# Altium PCB PCB.PcbDoc (part 2 of 2)
Units mm, origin at the board's own origin, x right, y up, seen from the top; angles counter-clockwise.
Board outline 100 x 110 mm, 6 copper layers (Top Layer, Inner Layer 2 (GND), Layer 3, Layer 4, Inner Layer 5 (GND), Bottom Layer 6), stack 1.597 mm thick; 88 components, 67 nets, 500 pads, 417 vias.
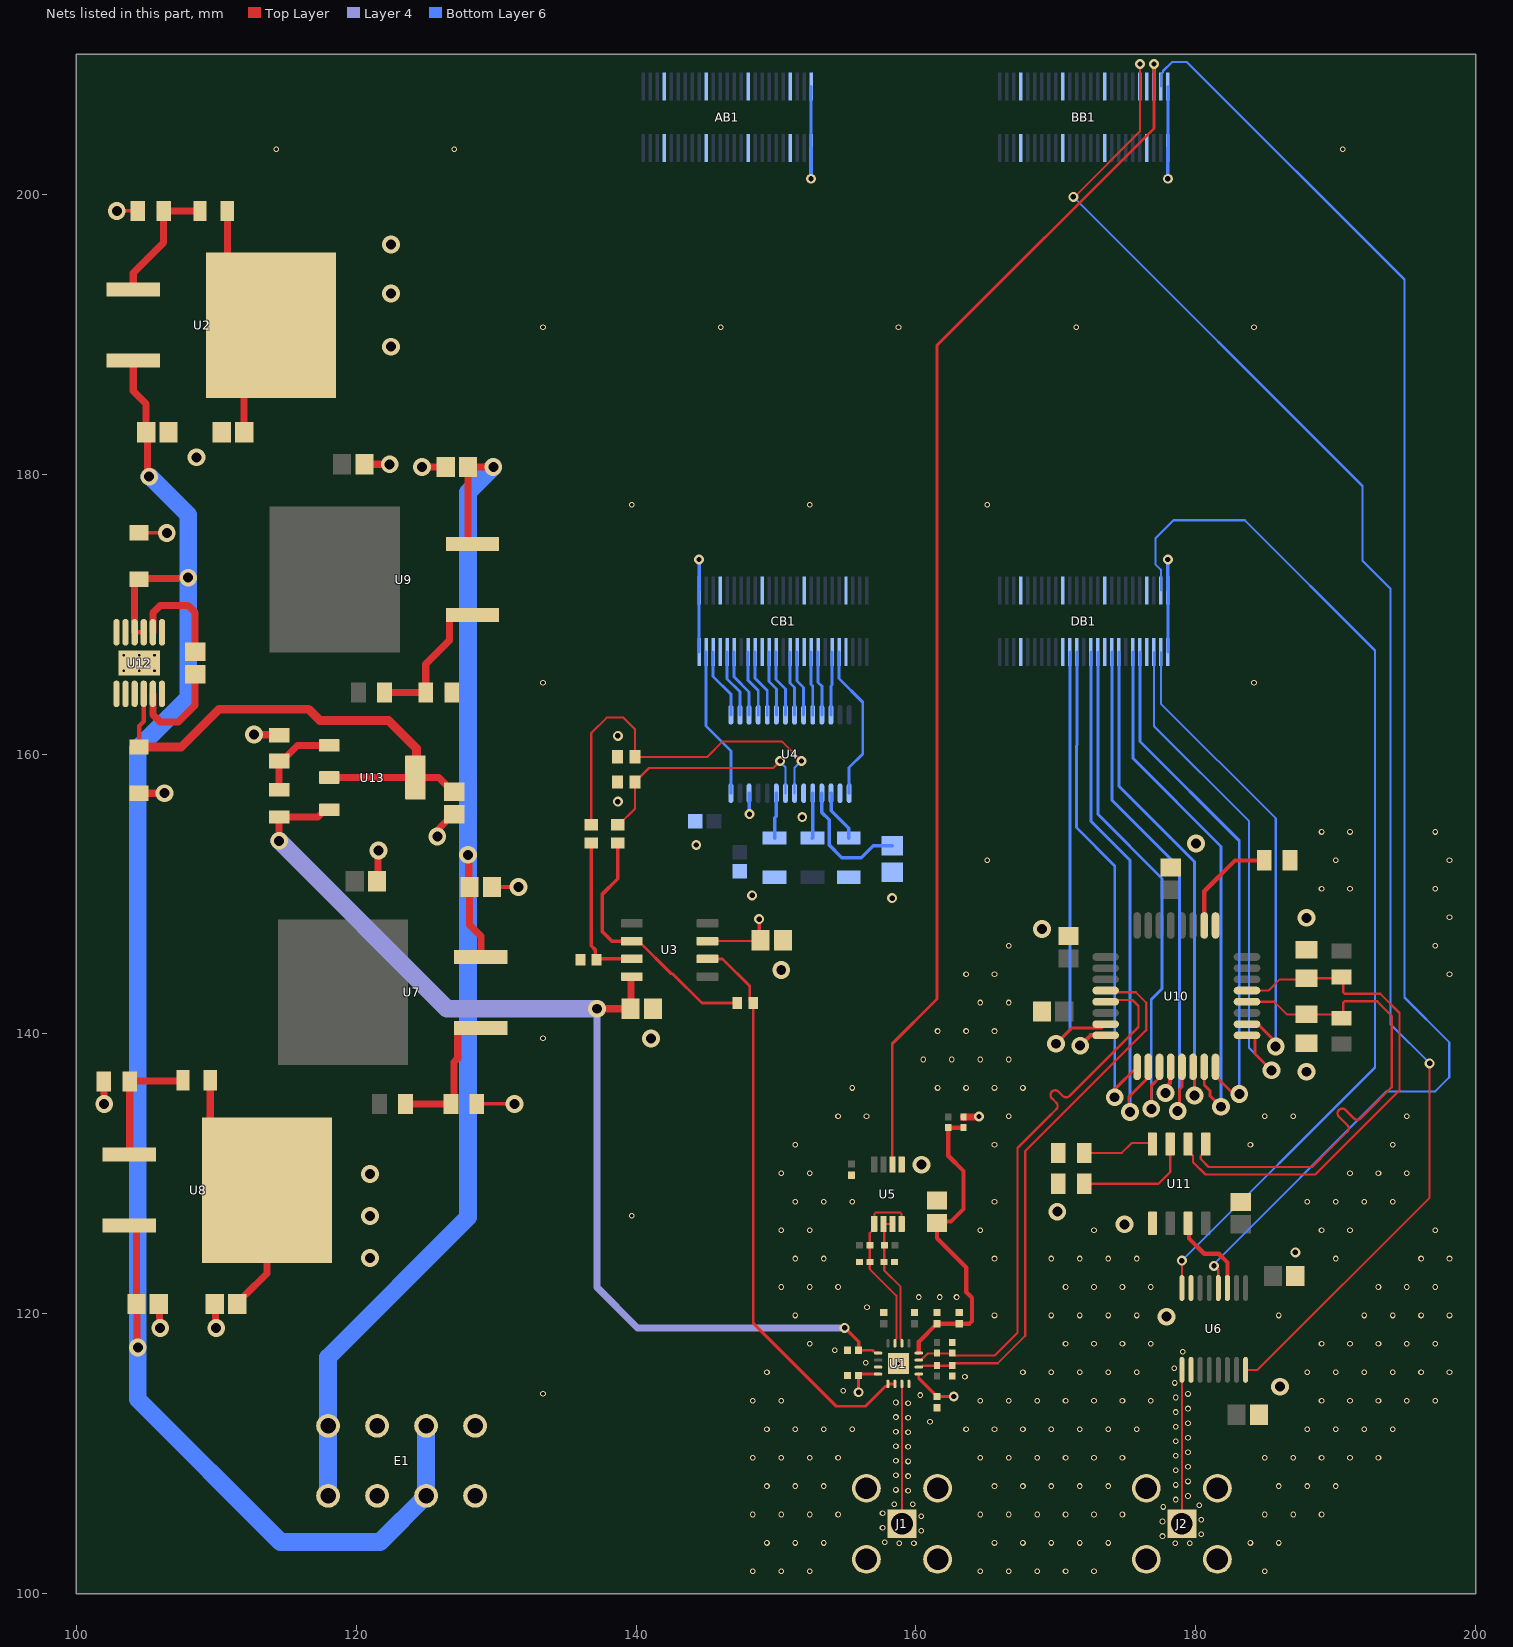
[diagram p6: the nets of this part, all layers, seen from the top]

## Via types
v1: diameter 0.406, hole 0.254, Top Layer to Bottom Layer 6, 278 vias
v2: diameter 1.27, hole 0.711, Top Layer to Bottom Layer 6, 62 vias
v3: diameter 0.711, hole 0.381, Top Layer to Bottom Layer 6, 50 vias
v4: diameter 0.6, hole 0.6, Top Layer to Bottom Layer 6, 16 vias
v5: diameter 0.5, hole 0.2, Top Layer to Bottom Layer 6, 7 vias
v6: diameter 3.4, hole 3.4, Top Layer to Bottom Layer 6, 4 vias

## Nets (pads, with @x,y where several pads share a name; then routed paths per layer and width w, separated by ;. In a path a pad name is that pad's centre, name@x,y a point inside that pad or via, vN(x,y) a via of type N, cw(c..) or ccw(c..) an arc to the next point about the centre after c; other vN are vias at no path point) (continued)
+5V_AN: C11.2 C21.1 C33.1 C35.2 R12.1 U1.5 U1.16 U3.7 U8.4 | length 29.9
  Top Layer w0.152: U3.7@145.1,146.635 148.835,146.635 C35.2@148.9,146.7
  Top Layer w0.203: v3(155.9,114.4) C21.1@155.9,115.6 156,115.7 157.102,115.7 U1.16@157.3,115.7 ; U1.5@160.2,115.7 160.2,115.4 161.342,114.258 C33.1@161.5,114.1 v3(162.7,114.1)
  Top Layer w0.254: v3(148.8,148.2) 148.8,146.8 C35.2@148.9,146.7
  Top Layer w0.508: R12.1@109.575,136.7 109.575,132.91 U8.4@113.64,128.844 113.64,122.882 112.785,122.027 112.752,122.027 111.5,120.775 C11.2@111.5,120.7
  other v2: 121,124 121,127 121,130
+5V_FPGA: AB1.1 AB1.50 BB1.1 BB1.50 C2.2 CB1.1 CB1.50 DB1.1 DB1.50 R1.1 U2.4 | length 44.3
  Top Layer w0.508: R1.1@110.8,198.8 110.8,193.774 U2.4@113.929,190.644 112,188.715 C2.2@112,183
  Bottom Layer 6 w0.203: CB1.1@144.5,167.3 CB1.50@144.5,171.7 ; AB1.50@152.5,203.3 AB1.1@152.5,207.7 ; DB1.50@178,167.3 DB1.1@178,171.7 ; BB1.50@178,203.3 BB1.1@178,207.7
  Bottom Layer 6 w0.254: CB1.50@144.5,171.7 v3(144.5,173.9) ; v3(152.5,201.1) AB1.50@152.5,203.3 ; DB1.1@178,171.7 v3(178,173.9) ; v3(178,201.1) BB1.50@178,203.3
  other v2: 122.5,189.1 122.5,192.9 122.5,196.4
+6V: C8.2 C12.2 E1.A4 U7.3 U9.3 | length 93.5
  Top Layer w0.508: v2(128,152.8) 128.05,152.75 128.05,150.55 C8.2@128.1,150.5 128.1,147.8 128.91,146.99 U7.3@128.91,145.507 ; U9.3@128.321,175.007 128.246,175.007 128,175.253 C12.2@128,180.5 v2(129.8,180.5)
  Bottom Layer 6 w1.27: E1.A4@118,107 E1.A4@118,112 118,116.9 128,126.9 v2(128,152.8) 128,178.7 v2(129.8,180.5)
+8V: C1.2 C10.2 C29.1 E1.A2 U2.3 U8.3 U12.9 U12.10 | length 125.8
  Top Layer w0.305: U12.10@104.175,168.7 U12.9@104.815,168.7
  Top Layer w0.508: U8.3@103.79,126.304 104.054,126.304 104.3,126.058 C10.2@104.3,120.7 104.35,120.65 104.35,117.65 v2(104.4,117.6) ; U2.3@104.079,188.104 104.079,185.927 105,185.006 C1.2@105,183 105.106,182.894 105.106,179.92 v2(105.211,179.814) ; U12.10@104.175,168.7 104.175,172.204 104.471,172.5 C29.1@104.5,172.5 104.55,172.55 107.95,172.55 v2(108,172.6)
  Bottom Layer 6 w1.27: v2(105.211,179.814) 105.286,179.814 108,177.1 v2(108,172.6) 108,164 104.4,160.4 v2(104.4,117.6) 104.4,113.9 114.6,103.7 121.7,103.7 E1.A2@125,107 E1.A2@125,112
-5V_AN: C22.2 C36.2 R33.1 U1.13 U3.4 U13.3 | length 80.2
  Top Layer w0.203: C22.2@155.9,117.4 156.903,117.4 157.103,117.2 U1.13@157.3,117.2
  Top Layer w0.254: v3(154.9,119) 155.9,118 C22.2@155.9,117.4
  Top Layer w0.508: v2(114.5,153.8) R33.1@114.5,155.5 117.286,155.5 117.806,156.02 U13.3@118.081,156.02 ; v2(137.2,141.8) C36.2@139.6,141.8 139.65,141.85 139.65,144.049 139.696,144.095 U3.4@139.7,144.095
  Layer 4 w0.508: v2(137.2,141.8) 137.2,121.9 140.1,119 v3(154.9,119)
  Layer 4 w1.27: v2(114.5,153.8) 126.5,141.8 v2(137.2,141.8)
-8V-Charge-Pump: C31.1 C32.2 U12.4 U13.2 U13.4 | length 37.5
  Top Layer w0.305: C31.1@104.5,160.5 104.5,162 104.825,162.325 U12.4@104.825,164.3
  Top Layer w0.508: U13.2@118.081,158.32 U13.4@124.231,158.32 125.905,158.32 126.925,157.3 C32.2@127,157.3
  Top Layer w0.635: C31.1@104.5,160.5 107.5,160.5 110.2,163.2 116.6,163.2 117.4,162.4 122.3,162.4 124.3,160.4 124.3,158.389 U13.4@124.231,158.32
COMPARE_OUT_N: R18.1 R22.2 U1.11 U5.1 U5.4 | length 12.9
  Top Layer w0.152: U1.11@158.5,117.9 158.5,118.113 158.598,118.21 158.598,121.302 156.7,123.2 R22.2@156.7,123.7 R18.1@156.7,124.9 156.7,125.757 157.025,126.081 157.025,127.146 157.114,127.235 158.885,127.235 158.975,127.146 U5.4@158.975,126.431
COMPARE_OUT_P: R19.1 R23.2 U1.10 U5.2 U5.3 | length 9.6
  Top Layer w0.152: U5.3@158.325,126.431 157.801,126.431 157.735,126.366 R19.1@157.735,124.9 157.735,123.7 157.735,123.096 158.902,121.929 158.902,118.21 159,118.113 U1.10@159,117.9
D0: DB1.49 U10.2 | length 34.5
  Top Layer w0.203: U10.2@183.65,140.7 184.417,140.7 185.496,139.621 185.496,139.304 v2(185.7,139.1)
  Bottom Layer 6 w0.152: DB1.49@177.5,167.3 177.5,163.6 185.7,155.4 v2(185.7,139.1)
D1: DB1.48 U10.1 | length 36.8
  Top Layer w0.203: U10.1@183.65,139.9 184.063,139.9 184.223,139.74 184.223,138.577 v2(185.4,137.4)
  Bottom Layer 6 w0.152: DB1.48@177,167.3 177,162 183.8,155.2 183.8,139 v2(185.4,137.4)
D2: DB1.46 U10.32 | length 37.4
  Top Layer w0.203: U10.32@181.4,137.65 181.4,136.987 182.687,135.7 v2(183.1,135.7)
  Bottom Layer 6 w0.203: DB1.46@176,167.3 176,160.9 183.1,153.8 v2(183.1,135.7)
D3: DB1.45 U10.31 | length 38.5
  Top Layer w0.203: U10.31@180.6,137.65 180.6,136.352 181.012,135.939 181.012,135.587 v2(181.8,134.8)
  Bottom Layer 6 w0.203: DB1.45@175.5,167.3 175.5,159.7 181.8,153.4 v2(181.8,134.8)
D4: DB1.43 U10.30 | length 36
  Top Layer w0.203: U10.30@179.8,137.65 179.9,137.55 v2(179.9,135.6)
  Bottom Layer 6 w0.203: DB1.43@174.5,167.3 174.5,157.7 179.9,152.3 v2(179.9,135.6)
D5: DB1.42 U10.29 | length 38.1
  Top Layer w0.203: v2(178.7,134.5) 178.823,134.623 178.823,136.024 179,136.201 U10.29@179,137.65
  Bottom Layer 6 w0.203: DB1.42@174,167.3 174,156.7 178.823,151.877 178.823,134.623 v2(178.7,134.5)
D6: DB1.40 U10.27 | length 38.1
  Top Layer w0.203: v2(176.813,134.652) 176.813,136.296 177.4,136.883 U10.27@177.4,137.65
  Bottom Layer 6 w0.203: DB1.40@173,167.3 173,155.7 177.589,151.111 177.589,143.229 176.813,142.453 v2(176.813,134.652)
D7: DB1.39 U10.26 | length 37.9
  Top Layer w0.203: v2(175.289,134.414) 175.202,134.5 175.2,134.5 175.2,135.483 176.6,136.883 U10.26@176.6,137.65
  Bottom Layer 6 w0.203: DB1.39@172.5,167.3 172.5,155.2 175.289,152.411 v2(175.289,134.414)
D8: DB1.37 U10.25 | length 35.8
  Top Layer w0.203: v2(174.198,135.478) 174.198,136.048 U10.25@175.8,137.65
  Bottom Layer 6 w0.203: DB1.37@171.5,167.3 171.5,160.66 171.457,160.618 171.457,154.743 174.198,152.002 v2(174.198,135.478)
D9: DB1.36 U10.23 | length 32.5
  Top Layer w0.203: v2(170,139.3) 171.129,140.429 173.279,140.429 U10.23@173.55,140.7
  Bottom Layer 6 w0.203: v2(170,139.3) 171,140.3 DB1.36@171,167.3
DAC_CLOCK: CB1.2 U4.28 | length 10.8
  Bottom Layer 6 w0.203: CB1.2@145,167.3 145,162 146.775,160.225 U4.28@146.775,157.2
DAC_DB0: CB1.20 U4.12 | length 4.5
  Bottom Layer 6 w0.203: U4.12@153.925,162.8 153.925,164.869 154,164.944 CB1.20@154,167.3
DAC_DB1: CB1.18 U4.11 | length 4.6
  Bottom Layer 6 w0.203: CB1.18@153,167.3 153,165.116 153.275,164.841 U4.11@153.275,162.8
DAC_DB2: CB1.17 U4.10 | length 4.6
  Bottom Layer 6 w0.203: CB1.17@152.5,167.3 152.5,164.969 152.625,164.844 U4.10@152.625,162.8
DAC_DB3: CB1.15 U4.9 | length 4.7
  Bottom Layer 6 w0.203: CB1.15@151.5,167.3 151.5,165.216 151.975,164.741 U4.9@151.975,162.8
DAC_DB4: CB1.14 U4.8 | length 4.6
  Bottom Layer 6 w0.203: CB1.14@151,167.3 151,165.069 151.325,164.744 U4.8@151.325,162.8
DAC_DB5: CB1.12 U4.7 | length 4.8
  Bottom Layer 6 w0.203: CB1.12@150,167.3 150,165.316 150.675,164.641 U4.7@150.675,162.8
DAC_DB6: CB1.11 U4.6 | length 4.7
  Bottom Layer 6 w0.203: CB1.11@149.5,167.3 149.5,165.169 150.025,164.644 U4.6@150.025,162.8
DAC_DB7: CB1.9 U4.5 | length 4.9
  Bottom Layer 6 w0.203: CB1.9@148.5,167.3 148.5,165.416 149.375,164.541 U4.5@149.375,162.8
DAC_DB8: CB1.8 U4.4 | length 4.8
  Bottom Layer 6 w0.203: CB1.8@148,167.3 148,165.269 148.725,164.544 U4.4@148.725,162.8
DAC_DB9: CB1.6 U4.3 | length 4.9
  Bottom Layer 6 w0.203: CB1.6@147,167.3 147,165.516 148.075,164.441 U4.3@148.075,162.8
DAC_DB10: CB1.5 U4.2 | length 4.9
  Bottom Layer 6 w0.203: CB1.5@146.5,167.3 146.5,165.369 147.425,164.444 U4.2@147.425,162.8
DAC_DB11: CB1.3 U4.1 | length 5
  Bottom Layer 6 w0.203: CB1.3@145.5,167.3 145.5,165.544 146.775,164.269 U4.1@146.775,162.8
DAC_SLEEP: CB1.21 U4.15 | length 11.2
  Bottom Layer 6 w0.203: CB1.21@154.5,167.3 154.5,165.4 156.2,163.7 156.2,160 155.225,159.025 U4.15@155.225,157.2
GND: AB1.4 AB1.10 AB1.16 AB1.22 AB1.29 AB1.35 AB1.41 AB1.47 BB1.4 BB1.10 BB1.16 BB1.22 BB1.29 BB1.35 BB1.41 BB1.47 C1.1 C2.1 C3.1 C4.1 C6.1 C7.1 C8.1 C9.1 C10.1 C11.1 C12.1 C13.1 C14.2 C15.1 C16.2 C17.2 C18.2 C19.2 C21.2 C22.1 C23.1 C24.1 C25.1 C26.1 C27.1 C28.1 C29.2 C31.2 C32.1 C33.2 C35.1 C36.1 CB1.4 CB1.10 CB1.16 CB1.22 CB1.29 CB1.35 CB1.41 CB1.47 DB1.4 DB1.10 DB1.16 DB1.22 DB1.29 DB1.35 DB1.41 DB1.47 E1.A1 E1.A3 J1.2 J1.3 J1.4 J1.5 J2.2 J2.3 J2.4 J2.5 R2.2 R3.2 R5.2 R7.1 R8.1 R11.1 R14.2 R15.1 R20.1 R21.1 R22.1 R23.1 R25.1 R28.1 R29.1 R30.1 R31.2 R32.2 R34.2 U1.4 U1.15 U1.17 U4.16 U4.20 U4.26 U5.5 U6.7 U6.10 U10.9 U10.24 U10.28 U11.5 U12.1 U12.2 U12.3 U12.6 U12.7 U12.11 U12.12 U12.13 | length 31.5
  Top Layer w0.254: v2(102.9,198.8) R2.2@104.4,198.8 ; C29.2@104.5,175.8 v2(106.476,175.8) ; R11.1@128.625,135 v2(131.324,135) ; C8.1@129.7,150.5 v2(131.6,150.5)
  Top Layer w0.305: v2(171.734,139.16) 172.473,139.9 U10.24@173.55,139.9 ; v2(177.833,135.788) 177.833,135.894 177.7,136.027 178.153,136.48 178.153,137.603 U10.28@178.2,137.65
  Top Layer w0.508: R14.2@101.975,136.6 101.987,136.588 101.987,135.012 v2(102,135) ; C31.2@104.5,157.2 v2(106.3,157.2) ; C10.1@105.9,120.7 105.95,120.65 105.95,119.05 v2(106,119) ; C11.1@109.9,120.7 109.95,120.65 109.95,119.05 v2(110,119) ; v2(112.7,161.4) 112.725,161.375 114.475,161.375 R34.2@114.5,161.35 ; C13.1@120.6,180.7 v2(122.4,180.7) ; C9.1@121.5,150.9 121.55,150.95 121.55,153.05 v2(121.6,153.1) ; v2(124.7,180.5) C12.1@126.4,180.5 ; v2(125.8,154.1) 125.946,154.246 125.946,154.721 126.925,155.7 C32.1@127,155.7 ; R25.1@163.4,134.05 163.411,134.061 164.461,134.061 v3(164.5,134.1)
  Bottom Layer 6 w0.254: U4.26@148.075,157.2 148.088,157.187 148.088,155.713 v3(148.1,155.7)
  other v1: 148.336,101.6 150.368,101.6 152.4,101.6 164.592,101.6 166.624,101.6 168.656,101.6 170.688,101.6 172.72,101.6 184.912,101.6 158.811,103.612 159.852,103.612 178.519,103.612 179.56,103.612 149.352,103.632 151.384,103.632 153.416,103.632 165.608,103.632 167.64,103.632 169.672,103.632 171.704,103.632 173.736,103.632 183.896,103.632 185.928,103.632 157.772,103.683 177.612,104.125 180.388,104.245 160.388,104.506 157.612,104.712 177.612,105.166 180.388,105.287 160.388,105.547 148.336,105.664 150.368,105.664 152.4,105.664 154.432,105.664 164.592,105.664 166.624,105.664 168.656,105.664 170.688,105.664 172.72,105.664 174.752,105.664 184.912,105.664 186.944,105.664 188.976,105.664 157.612,105.754 177.668,106.206 180.23,106.316 158.439,106.388 159.773,106.388 178.566,106.734 179.434,106.988 159.434,107.372 158.566,107.421 149.352,107.696 151.384,107.696 153.416,107.696 165.608,107.696 167.64,107.696 169.672,107.696 171.704,107.696 173.736,107.696 185.928,107.696 187.96,107.696 189.992,107.696 178.566,107.775 179.434,108.029 159.434,108.414 158.566,108.463 178.566,108.817 179.434,109.071 159.434,109.455 158.566,109.504 148.336,109.728 150.368,109.728 152.4,109.728 154.432,109.728 164.592,109.728 166.624,109.728 168.656,109.728 170.688,109.728 172.72,109.728 174.752,109.728 184.912,109.728 186.944,109.728 188.976,109.728 191.008,109.728 193.04,109.728 178.566,109.858 179.434,110.112 159.434,110.497 158.566,110.545 178.566,110.9 179.434,111.153 159.434,111.538 158.566,111.587 149.352,111.76 151.384,111.76 153.416,111.76 155.448,111.76 163.576,111.76 165.608,111.76 167.64,111.76 169.672,111.76 171.704,111.76 173.736,111.76 175.768,111.76 187.96,111.76 189.992,111.76 192.024,111.76 194.056,111.76 178.566,111.941 179.434,112.195 161,112.3 159.434,112.579 158.566,112.628 178.566,112.982 179.434,113.236 159.434,113.621 158.566,113.67 148.336,113.792 150.368,113.792 164.592,113.792 166.624,113.792 168.656,113.792 170.688,113.792 172.72,113.792 174.752,113.792 176.784,113.792 188.976,113.792 191.008,113.792 193.04,113.792 195.072,113.792 197.104,113.792 178.566,114.024 160.3,114.2 179.434,114.278 133.35,114.3 154.8,114.5 178.499,115.063 163.5,115.5 149.352,115.824 167.64,115.824 169.672,115.824 171.704,115.824 173.736,115.824 175.768,115.824 187.96,115.824 189.992,115.824 192.024,115.824 194.056,115.824 196.088,115.824 198.12,115.824 178.459,116.104 156.4,116.5 179.071,117.284 154.2,117.4 152.4,117.856 170.688,117.856 172.72,117.856 174.752,117.856 176.784,117.856 188.976,117.856 191.008,117.856 193.04,117.856 195.072,117.856 197.104,117.856 151.384,119.888 165.608,119.888 169.672,119.888 171.704,119.888 173.736,119.888 175.768,119.888 185.928,119.888 192.024,119.888 194.056,119.888 196.088,119.888 198.12,119.888 156.5,120.463 160.2,121.2 161.7,121.2 162.9,121.2 150.368,121.92 152.4,121.92 154.432,121.92 170.688,121.92 172.72,121.92 174.752,121.92 176.784,121.92 193.04,121.92 195.072,121.92 197.104,121.92 151.384,123.952 153.416,123.952 165.608,123.952 169.672,123.952 171.704,123.952 173.736,123.952 175.768,123.952 189.992,123.952 196.088,123.952 198.12,123.952 150.368,125.984 152.4,125.984 164.592,125.984 172.72,125.984 188.976,125.984 191.008,125.984 197.104,125.984 139.7,127 151.384,128.016 153.416,128.016 155.448,128.016 165.608,128.016 187.96,128.016 189.992,128.016 192.024,128.016 194.056,128.016 150.368,130.048 152.4,130.048 191.008,130.048 193.04,130.048 195.072,130.048 151.384,132.08 165.608,132.08 183.896,132.08 194.056,132.08 154.432,134.112 156.464,134.112 166.624,134.112 184.912,134.112 186.944,134.112 195.072,134.112 155.448,136.144 161.544,136.144 163.576,136.144 165.608,136.144 167.64,136.144 160.528,138.176 162.56,138.176 164.592,138.176 166.624,138.176 133.35,139.7 161.544,140.208 163.576,140.208 165.608,140.208 164.592,142.24 166.624,142.24 163.576,144.272 165.608,144.272 198.12,144.272 166.624,146.304 197.104,146.304 198.12,148.336 188.976,150.368 191.008,150.368 197.104,150.368 165.1,152.4 189.992,152.4 198.12,152.4 188.976,154.432 191.008,154.432 197.104,154.432 133.35,165.1 184.15,165.1 139.7,177.8 152.4,177.8 165.1,177.8 133.35,190.5 146.05,190.5 158.75,190.5 171.45,190.5 184.15,190.5 114.3,203.2 127,203.2 190.5,203.2
  other v2: 186,114.8 177.9,119.8 174.9,126.4 170.1,127.3 160.4,130.656 187.9,137.3 141.073,139.673 150.373,144.573 169,147.5 187.9,148.3 180,153.6 108.6,181.2
  other v3: 187.1,124.4 158.3,149.7 148.3,149.9 144.3,153.5 151.874,155.489 138.7,156.6 138.7,161.3
  other v5: 158.75,116.45 103.4,165.95 104.5,165.95 105.6,165.95 103.4,167.05 104.5,167.05 105.6,167.05
IOUT+: R6.1 R8.2 U4.22 | length 17.1
  Top Layer w0.152: R6.1@138.7,154.95 138.775,154.95 139.925,156.1 R8.2@139.925,158 140.925,159 149.8,159 v3(150.3,159.5)
  Bottom Layer 6 w0.152: v3(150.3,159.5) 150.3,159.424 150.675,159.049 U4.22@150.675,157.2
IOUT-: R4.1 R7.2 U4.21 | length 27.9
  Top Layer w0.152: R4.1@136.8,154.95 136.8,161.5 137.9,162.6 139.1,162.6 139.925,161.775 R7.2@139.925,159.8 145.1,159.8 146.2,160.9 150.418,160.9 v3(151.818,159.5)
  Bottom Layer 6 w0.152: U4.21@151.325,157.2 151.325,159.007 v3(151.818,159.5)
Latch-Enable_N: R16.1 R20.2 U1.6 U10.20 | length 39.2
  Top Layer w0.152: U1.6@160.2,116.2 160.413,116.2 160.51,116.298 R16.1@161.498,116.298 R20.2@162.598,116.298
  Top Layer w0.164: R20.2@162.598,116.298 162.598,116.323 162.741,116.466 162.826,116.466 162.837,116.476 165.847,116.476 167.8,118.429 167.8,131.05 167.8,131.629 173.667,137.496 176.445,140.274 176.445,142.226 175.698,142.972 174.457,142.972 174.329,143.1 U10.20@173.55,143.1
Latch-Enable_P: R17.1 R21.2 U1.7 U10.21 | length 39.2
  Top Layer w0.152: U1.7@160.2,116.7 160.387,116.7 160.409,116.722 160.409,116.767 160.513,116.871 160.536,116.871 160.83,117.165 R21.2@162.6,117.165
  Top Layer w0.164: R21.2@162.6,117.2 162.6,117.175 162.743,117.032 162.828,117.032 162.839,117.021 165.621,117.021 167.255,118.655 167.255,131.855 169.437,134.037 170.017,134.617 ccw(c169.779,134.854) 170.017,135.092 169.709,135.4 cw(c169.947,135.637) 169.709,135.875 cw(c169.947,135.637) 170.184,135.875 170.492,135.567 ccw(c170.729,135.805) 170.967,135.567 171.5,136.1 175.9,140.5 175.9,142 175.472,142.428 174.457,142.428 174.329,142.3 U10.21@173.55,142.3
NetBB1_2: BB1.2 U6.4 | length 107.6
  Top Layer w0.152: v3(181.299,123.427) 181.6,123.125 U6.4@181.6,121.85
  Bottom Layer 6 w0.152: BB1.2@177.5,207.7 177.5,208.575 177.646,208.721 177.646,208.795 178.298,209.447 179.353,209.447 194.9,193.9 194.9,142.6 198.1,139.4 198.1,136.9 197.1,135.9 193.622,135.9 181.299,123.577 v3(181.299,123.427)
NetBB1_3: BB1.3 U5.6 | length 88
  Top Layer w0.203: U5.6@158.325,130.681 158.3,130.706 158.3,139.3 161.5,142.5 161.5,189.2 177,204.7 v3(177,209.3)
  Bottom Layer 6 w0.203: BB1.3@177,207.7 v3(177,209.3)
NetBB1_5: BB1.5 U6.16 | length 113.4
  Top Layer w0.152: v3(171.245,199.807) 171.333,199.807 176,204.474 v3(176,209.3) ; U6.16@183.55,116 184.4,116 196.7,128.3 v3(196.7,137.9)
  Bottom Layer 6 w0.152: v3(171.245,199.807) 191.9,179.152 191.9,173.8 193.9,171.8 193.9,140.7 v3(196.7,137.9) ; BB1.5@176,207.7 v3(176,209.3)
NetC3_2: C3.2 U4.17 | length 3.7
  Bottom Layer 6 w0.254: U4.17@153.925,157.2 153.943,157.182 153.943,155.957 155.2,154.7 C3.2@155.2,154
NetC4_2: C4.2 U4.23 | length 3.3
  Bottom Layer 6 w0.254: C4.2@149.9,154 149.9,155.436 150.025,155.561 U4.23@150.025,157.2
NetC5_2: C5.2 U4.19 | length 3.2
  Bottom Layer 6 w0.254: C5.2@152.6,154 152.625,154.025 U4.19@152.625,157.2
NetC14_1: C14.1 C15.2 C16.1 R24.1 R25.2 U1.8 | length 22.9
  Top Layer w0.305: U1.8@160.2,117.2 160.2,118 C14.1@161.5,119.3 C16.1@163.1,119.3 163.821,119.3 164,119.479 164,121.15 163.6,121.55 163.6,123.3 161.5,125.4 C15.2@161.5,126.5 161.604,126.604 162.504,126.604 163.4,127.5 163.4,130.2 162.3,131.3 R24.1@162.3,133.3 R25.2@163.4,133.3
NetC30_1: C30.1 U12.5 | length 7.4
  Top Layer w0.508: U12.5@105.475,164.3 105.475,162.825 106,162.3 107.3,162.3 108.5,163.5 C30.1@108.5,165.7
NetC30_2: C30.2 U12.8 | length 7.6
  Top Layer w0.508: U12.8@105.475,168.7 105.475,170.075 106,170.6 108,170.6 108.5,170.1 C30.2@108.5,167.3
NetDB1_2: DB1.2 U6.8 | length 75.2
  Top Layer w0.152: U6.8@179,121.85 v3(179,123.8)
  Bottom Layer 6 w0.152: DB1.2@177.5,171.7 177.5,173.162 177.1,173.562 177.1,175.4 178.4,176.7 183.5,176.7 192.8,167.4 192.8,137.6 v3(179,123.8)
NetJ1_1: J1.1 U1.3 | length 10
  Top Layer w0.132: J1.1@159,105 U1.3@159,115
NetJ2_1: J2.1 U6.9 | length 11
  Top Layer w0.132: J2.1@179,105 U6.9@179,116
NetR1_2: R1.2 R2.1 U2.1 | length 9.1
  Top Layer w0.508: U2.1@104.079,193.184 104.079,194.379 106.25,196.55 R2.1@106.25,198.8 R1.2@108.85,198.8
NetR3_1: R3.1 R4.2 U3.3 | length 11.1
  Top Layer w0.254: R4.2@136.8,153.65 136.8,146.3 137.1,146 137.1,145.375 R3.1@137.175,145.3 137.24,145.365 U3.3@139.7,145.365
NetR5_1: R5.1 U4.18 | length 9.1
  Bottom Layer 6 w0.254: U4.18@153.275,157.2 153.275,155.825 153.8,155.3 153.8,153.5 154.7,152.6 156.1,152.6 156.95,153.45 R5.1@158.3,153.45
NetR6_2: R6.2 R9.1 U3.2 | length 18.5
  Top Layer w0.203: U3.2@139.7,146.635 140.175,146.635 142.51,144.3 142.6,144.3 144.7,142.2 R9.1@147.225,142.2
  Top Layer w0.254: R6.2@138.7,153.65 138.7,151.1 137.6,150 137.6,147.3 138.265,146.635 U3.2@139.7,146.635
NetR10_1: R10.1 R11.2 U7.1 | length 10.4
  Top Layer w0.508: R10.1@123.525,135 R11.2@126.775,135 127,135.225 127,138 127.264,138.264 127.264,140.181 127.51,140.427 U7.1@128.91,140.427
NetR12_2: R12.2 R14.1 U8.1 | length 9.1
  Top Layer w0.508: U8.1@103.79,131.384 103.825,131.419 R14.1@103.825,136.6 103.875,136.65 107.575,136.65 R12.2@107.625,136.7
NetR13_1: R13.1 R15.2 U9.1 | length 10.7
  Top Layer w0.508: R13.1@122.025,164.4 R15.2@124.975,164.4 124.975,166.426 126.675,168.126 126.675,169.681 126.921,169.927 U9.1@128.321,169.927
NetR30_2: R30.2 U10.10 | length 7.6
  Top Layer w0.305: U10.10@180.6,147.75 180.6,150.2 182.8,152.4 R30.2@184.875,152.4
NetR31_1: R31.1 U11.4 | length 5.2
  Top Layer w0.152: R31.1@172.025,131.5 174.7,131.5 175.4,132.2 176.82,132.2 U11.4@176.895,132.125
NetR32_1: R32.1 U11.3 | length 8.5
  Top Layer w0.152: R32.1@172.025,129.3 177.33,129.3 178.165,130.135 U11.3@178.165,132.125
NetR33_2: R33.2 R34.1 U13.1 | length 6.1
  Top Layer w0.508: R33.2@114.5,157.45 R34.1@114.5,159.5 114.7,159.5 115.82,160.62 U13.1@118.081,160.62
NetU6_3: U6.3 U11.7 | length 6.4
  Top Layer w0.305: U11.7@179.435,126.475 179.509,126.401 179.509,125.391 180.6,124.3 181.628,124.3 182.25,123.678 U6.3@182.25,121.85
TRIGGER_DIFF_N: R27.1 R29.2 U10.5 U11.2 | length 37.4
  Top Layer w0.152: U10.5@183.65,143.1 185.2,143.1 186,143.9 187.825,143.9 R29.2@187.9,143.975 190.3,143.975 R27.1@190.4,144.075
  Top Layer w0.164: U11.2@179.435,132.125 179.435,131.625 179.678,131.382 179.702,131.382 179.798,131.286 179.798,130.84 180.682,129.955 188.526,129.955 194.545,135.974 194.545,141.502 193.175,142.872 190.622,142.872 190.526,142.968 R27.1@190.526,143.975
TRIGGER_DIFF_P: R26.1 R28.2 U10.4 U11.1 | length 37.4
  Top Layer w0.152: U10.4@183.65,142.3 185.6,142.3 186.5,141.4 R28.2@187.9,141.4 190.125,141.4 R26.1@190.4,141.125
  Top Layer w0.164: U11.1@180.705,132.125 180.705,131.625 180.462,131.382 180.438,131.382 180.342,131.286 180.342,131.066 180.908,130.5 188.3,130.5 189.7,131.9 190.817,133.017 ccw(c190.579,133.254) 190.817,133.492 190.214,134.095 cw(c190.451,134.333) 190.214,134.57 cw(c190.451,134.333) 190.689,134.57 191.292,133.967 ccw(c191.529,134.205) 191.767,133.967 192.3,134.5 194,136.2 194,141.277 192.949,142.328 190.622,142.328 190.526,142.232 190.526,141.251 R26.1@190.4,141.125
VCOMPARE: R9.2 U1.1 U1.2 U3.6 | length 41.4
  Top Layer w0.203: U3.6@145.1,145.365 146.18,145.365 148.127,143.418 148.127,142.448 R9.2@148.375,142.2 148.375,119.325 154.3,113.4 156.4,113.4 157.802,114.802 157.998,114.802 158,114.803 U1.1@158,115 U1.2@158.5,115
pads on no net: AB1.2 AB1.3 AB1.5 AB1.6 AB1.8 AB1.9 AB1.11 AB1.12 AB1.14 AB1.15 AB1.17 AB1.18 AB1.20 AB1.21 AB1.23 AB1.24 AB1.27 AB1.28 AB1.30 AB1.31 AB1.33 AB1.34 AB1.36 AB1.37 AB1.39 AB1.40 AB1.42 AB1.43 AB1.45 AB1.46 AB1.48 AB1.49 BB1.6 BB1.8 BB1.9 BB1.11 BB1.12 BB1.14 BB1.15 BB1.17 BB1.18 BB1.20 BB1.21 BB1.23 BB1.24 BB1.27 BB1.28 BB1.30 BB1.31 BB1.33 BB1.34 BB1.36 BB1.37 BB1.39 BB1.40 BB1.42 BB1.43 BB1.45 BB1.46 BB1.48 BB1.49 CB1.23 CB1.24 CB1.27 CB1.28 CB1.30 CB1.31 CB1.33 CB1.34 CB1.36 CB1.37 CB1.39 CB1.40 CB1.42 CB1.43 CB1.45 CB1.46 CB1.48 CB1.49 DB1.3 DB1.5 DB1.6 DB1.8 DB1.9 DB1.11 DB1.12 DB1.14 DB1.15 DB1.17 DB1.18 DB1.20 DB1.21 DB1.23 DB1.24 DB1.27 DB1.28 DB1.30 DB1.31 DB1.33 DB1.34 U1.14 U3.1 U3.5 U3.8 U4.13 U4.14 U4.25 U5.7 U6.1 U6.5 U6.6 U6.11 U6.12 U6.13 U6.14 U10.3 U10.6 U10.7 U10.8 U10.11 U10.12 U10.14 U10.15 U10.16 U10.17
copper on no net:
  other v4: 143.55,168.25 157.45,168.25 165.05,168.25 178.95,168.25 143.55,170.75 157.45,170.75 165.05,170.75 178.95,170.75 139.55,204.25 153.45,204.25 165.05,204.25 178.95,204.25 139.55,206.75 153.45,206.75 165.05,206.75 178.95,206.75
  other v6: 103,103 197,103 103,207 197,207

## Polygon pours and split planes (outlines as drawn)
GND on Top Layer "Top Layer-GND" (solid, pour order 25): 159.096,115.864 159.22,115.839 159.297,115.808 159.426,115.721 159.483,115.683 159.533,115.609 159.608,115.497 159.639,115.42 159.657,115.331 159.683,115.2 159.683,114.8 159.667,114.72 159.646,114.615 159.646,106.6 160.025,106.6 160.245,106.556 160.432,106.432 160.556,106.245 160.6,106.025 160.6,103.975 160.556,103.755 160.432,103.568 160.245,103.444 160.025,103.4 157.975,103.4 157.755,103.444 157.568,103.568 157.444,103.755 157.4,103.975 157.4,106.025 157.444,106.245 157.568,106.432 157.755,106.556 157.975,106.6 158.354,106.6 158.354,114.615 158.343,114.669 158.317,114.8 158.317,115.2 158.333,115.28 158.361,115.42 158.392,115.497 158.479,115.626 158.517,115.683 158.591,115.733 158.703,115.808 158.78,115.839 158.861,115.855 159,115.883
GND on Top Layer "Top Layer-GND 1" (solid, pour order 24): 179.18,117.479 179.216,117.464 179.388,117.393 179.446,117.354 179.498,117.301 179.604,117.196 179.643,117.138 179.729,116.93 179.742,116.862 179.742,116.806 179.753,116.75 179.753,115.25 179.742,115.194 179.742,115.138 179.729,115.07 179.714,115.034 179.646,114.871 179.646,106.6 180.025,106.6 180.245,106.556 180.432,106.432 180.556,106.245 180.6,106.025 180.6,103.975 180.556,103.755 180.432,103.568 180.245,103.444 180.025,103.4 177.975,103.4 177.755,103.444 177.568,103.568 177.444,103.755 177.4,103.975 177.4,106.025 177.444,106.245 177.568,106.432 177.755,106.556 177.975,106.6 178.354,106.6 178.354,114.871 178.271,115.07 178.258,115.138 178.258,115.194 178.247,115.25 178.247,116.75 178.258,116.806 178.258,116.862 178.271,116.93 178.286,116.966 178.357,117.138 178.396,117.196 178.449,117.248 178.554,117.354 178.612,117.393 178.82,117.479 178.888,117.492 179,117.492 179.112,117.492
+5V_FPGA on Top Layer "+5V_FPGA_L01_P013" (solid, remove dead copper, pour order 13): 110,203 109,202 109,198 108,197 108,186.506 111,183.506 111,181 116,181 119,184 124,184 127,187 127,200 124,203
+3V3_DI on Top Layer "+3V3_DI_L01_P009" (solid, remove dead copper, pour order 9): 110,178 111,179 125,179 126,178 126,168 121,163 118,163 116,165 112,165 110,167
+3V3_AN on Top Layer "+3V3_AN_L01_P007" (solid, remove dead copper, pour order 7): 112,137 110,139 110,149 113,152 126,152 126,134 121,134 118,137
+5V_AN on Top Layer "+5V_AN_L01_P003" (solid, remove dead copper, pour order 3): 107,119 109,117 119,117 123,121 123,131 118,136 107,136
GND on Top Layer "GND_L02_P-001" (solid, remove dead copper, pour order 15): 100,100 100,210 200,210 200,100
+3V3_D on Layer 3 "+3V3_D_L03_P014" (solid, remove dead copper, pour order 14): 136,210 182,210 182,167 180,165 142,165 139,168 139,199 136,202
+3V3_AN on Layer 3 "+3V3_AN_L03_P008" (solid, remove dead copper, pour order 8): 123,137 135,149 159,149 162,152 162,156 158,160 143,160 135,152 113,152 110,149 110,139 112,137
+5V_AN on Layer 3 "+5V_AN_L03_P006" (solid, remove dead copper, pour order 6): 115,111 167,111 169,113 169,148 168,149 135,149 123,137 108,137 105,134 105,121
+3V3_DI on Layer 4 "+3V3_DI_L04_P012" (solid, remove dead copper, pour order 12): 139,143 139,109.6 185.6,109.6 199,123 199,161 194,166 142,166 129,179 111,179 110,178 110,172
+5V_FPGA on Layer 4 "+5V_FPGA_L04_P010" (solid, remove dead copper, pour order 10): 107,196 107,185 111,181 128,181 143,166 182,166 187,171 187,207 185,209 120,209
GND on Inner Layer 2 (GND) "GND_L02_P-001" (solid, remove dead copper, pour order 0): 100,100 100,210 200,210 200,100
GND on Inner Layer 5 (GND) "GND_L02_P-001" (solid, remove dead copper, pour order 1): 100,100 100,210 200,210 200,100
GND on Bottom Layer 6 "GND_L02_P-001" (solid, remove dead copper, pour order 5): 100,100 100,210 200,210 200,100

## Keep-outs
Keep-Out Layer:
  the board outline again, w0.254

## Dimensions
159,105 to 179,105 on Mechanical 1

## Text inside footprints (layer, text, board x,y; h text height)
E1: Top Overlay "A1" at 133,108 h1.5 r180